# Altium PCB PCB_connector_V1.0_2024-03-05.pcbdoc
Units mm, origin at the board's own origin, x right, y up, seen from the top; angles counter-clockwise.
Board outline 180.37 x 106.29 mm, 2 copper layers (Top Layer, Bottom Layer); 61 components, 75 nets, 220 pads, 225 vias.
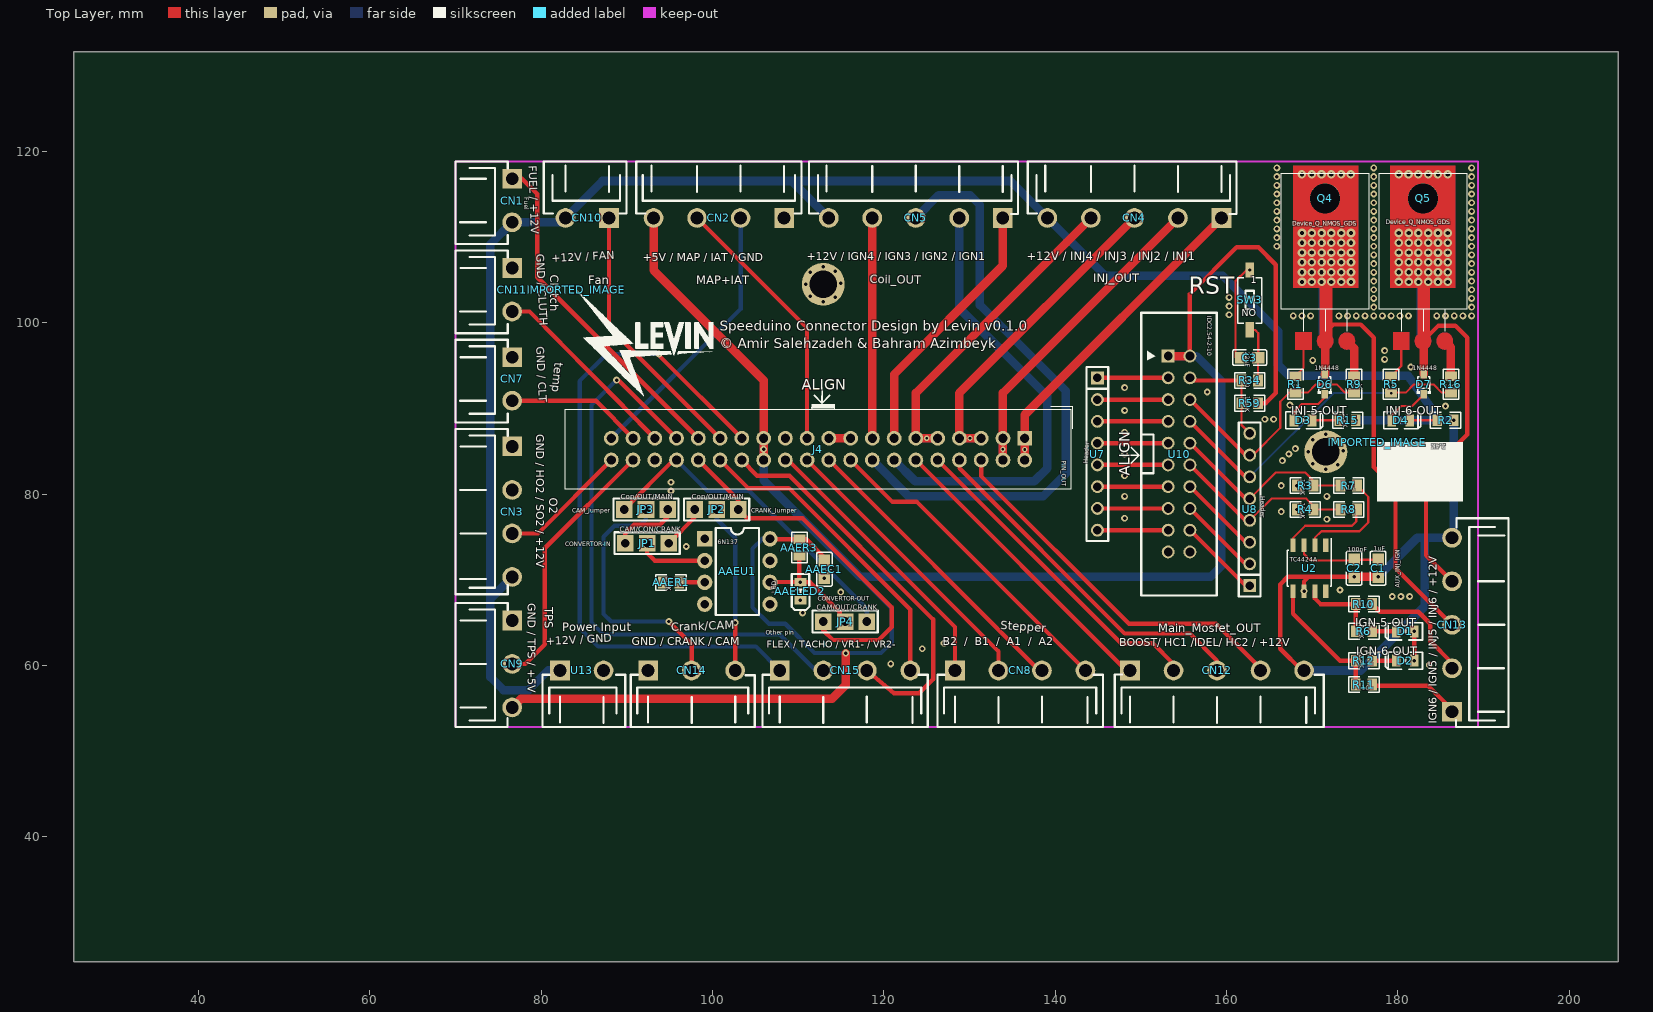
[diagram p0: Top Layer view]
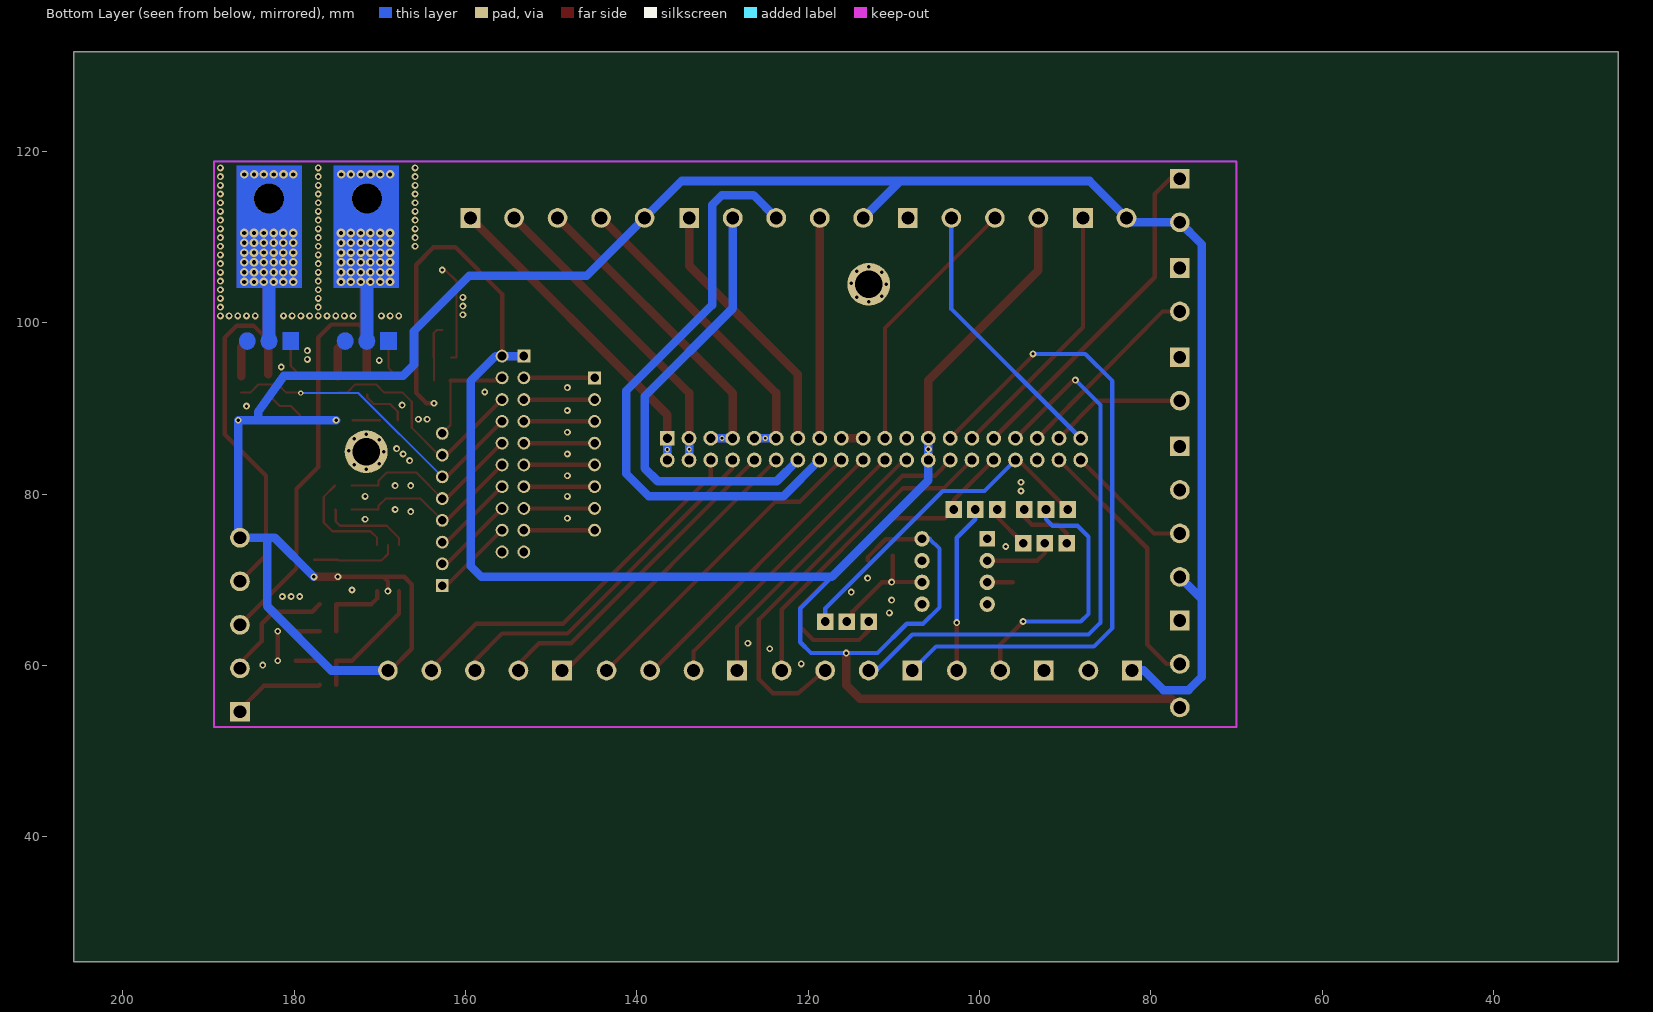
[diagram p1: Bottom Layer view, seen from below]

## Layer stack, top to bottom
Top Layer: signal copper (thickness not stored)
Dielectric: dielectric 0.32, FR-4, Dk 4.8
Bottom Layer: signal copper (thickness not stored)

## Board outline
205.772,25.4 25.4,25.4 25.4,131.687 205.772,131.687

## Components (designator, comment, footprint, x,y, rotation, side; value= is the part's Value field where it differs from the comment)
AAEC1 "1nF" C0805#1 113.062,71.235 r270 top
AAELED2 "LED" LED0805-R-RD 110.268,68.695 r90 top
AAER1 "5.6K" R0805 95.155,69.711 r180 top
AAER3 "4.7K" R0805 110.141,73.775 r90 top
AAEU1 "6N137" DIP-8_L9.7-W6.4-P2.54-LS7.6-BL 102.902,70.981 r270 top
C1 "1uF" C0805#2 177.705,71.362 r90 top
C2 "100nF" C0805#2 174.911,71.362 r90 top
C3 "22uF" C0805#2 162.719,95.954 r180 top
CN1 "Fuel" "PHONIX 2PIN (5.08MM)" 76.613,114.034 r270 top
CN2 "MAP+IAT" "PHONIX 4PIN (5.08MM)" 100.743,112.256 r180 top
CN3 "O2" "PHONIX 4PIN (5.08MM)" 76.613,77.966 r270 top
CN4 "INJ_OUT" "PHONIX 5PIN (5.08MM)" 149.257,112.256 r180 top
CN5 "Coil_OUT" "PHONIX 5PIN (5.08MM)" 123.73,112.256 r180 top
CN7 "temp" "PHONIX 2PIN (5.08MM)" 76.613,93.206 r270 top
CN8 "Stepper" "PHONIX 4PIN (5.08MM)" 135.922,59.424 r0 top
CN9 "TPS" "PHONIX 3PIN (5.08MM)" 76.613,57.646 r270 top
CN10 "Fan" "PHONIX 2PIN (5.08MM)" 85.122,112.256 r180 top
CN11 "Clutch" "PHONIX 2PIN (5.08MM)" 76.613,103.62 r270 top
CN12 "Main_Mosfet_OUT" "PHONIX 5PIN (5.08MM)" 158.909,59.424 r0 top
CN13 "AUX_INJ_IGN" "PHONIX 5PIN (5.08MM)" 186.341,64.758 r90 top
CN14 "Crank/CAM" "PHONIX 3PIN (5.08MM)" 100.108,59.424 r0 top
CN15 "Other pin" "PHONIX 4PIN (5.08MM)" 115.475,59.424 r0 top
D1 "IGN-5-OUT" LED0805_RED 180.882,63.995 r180 top
D2 "IGN-6-OUT" LED0805_RED 180.882,60.566 r180 top
D3 "INJ-5-OUT" LED0805_RED 168.944,88.633 r0 top
D4 "INJ-6-OUT" LED0805_RED 180.374,88.633 r0 top
D6 "1N4448" SOD-323_L1.8-W1.3-LS2.5-RD 171.483,92.825 r90 top
D7 "1N4448" SOD-323_L1.8-W1.3-LS2.5-RD 183.04,92.825 r90 top
IMPORTED_IMAGE "IMPORTED_IMAGE" IMPORTED_IMAGE 177.613,86.094 r0 top
IMPORTED_IMAGE "IMPORTED_IMAGE" IMPORTED_IMAGE 84.106,103.884 r0 top
J4 "PIN_OUT" IDC-HEADER_2X20_P2.54MM_VERTICAL 112.046,84.951 r270 top
JP1 "CONVERTOR-IN" "JUMPER 3X1 (PIN= 2.54)" 92.361,74.283 r180 top
JP2 "CRANK_Jumper" "JUMPER 3X1 (PIN= 2.54)" 100.489,78.22 r0 top
JP3 "CAM_Jumper" "JUMPER 3X1 (PIN= 2.54)" 92.234,78.22 r0 top
JP4 "CONVERTOR-OUT" "JUMPER 3X1 (PIN= 2.54)" 115.475,65.139 r0 top
Q4 "Device_Q_NMOS_GDS" TO-220_Q_NMOS_GDS 171.482,106.16 r0 top
Q5 "Device_Q_NMOS_GDS" TO-220_Q_NMOS_GDS 182.912,106.16 r0 top
R1 "1K" R0805 168.053,92.825 r90 top
R2 "2.4K" R0805 185.579,88.634 r180 top
R3 "100K" R0805 169.196,81.014 r0 top
R4 "100K" R0805 169.196,78.22 r180 top
R5 "1K" R0805 179.229,92.825 r90 top
R6 "2.4K" R0805 176.054,63.996 r180 top
R7 "1K" R0805 174.276,81.014 r0 top
R8 "1K" R0805 174.276,78.22 r0 top
R9 "100K" R0805 174.911,92.825 r270 top
R10 "10" R0805 176.054,67.171 r180 top
R11 "10" R0805 176.054,57.773 r180 top
R12 "2.4K" R0805 176.054,60.567 r180 top
R15 "2.4K" R0805 174.149,88.634 r180 top
R16 "100K" R0805 186.214,92.825 r90 top
R34 "120" R0805 162.719,93.287 r180 top
R59 "100K" R0805 162.719,90.62 r180 top
SW3 "RST" SW-SMD_L5.4-W2.8-LS8.2 162.719,102.685 r180 top
U2 "TC4424A" SOIC-8_3.9X4.9MM_P1.27MM 169.45,72.251 r90 top
U7 "Header" "1X8 HEADER (PIN = 2.54)" 144.939,84.697 r90 top
U8 "Header" "1X8 HEADER (PIN = 2.54)" 162.719,78.22 r270 top
U10 "IDC2.54-2-10" IDC-TH_20P-P2.54_ZX-IDC2.54-2-10PZZ 154.464,84.697 r270 top
U13 "Power Input" "PHONIX 2PIN (5.08MM)" 84.995,59.424 r0 top
? "" ? 54.017,83.554 r0 top
? "" ? 129.699,45.485 r0 top

## Footprints (in the part's own frame and the unit in brackets; to place one, negate y for a bottom-side part, rotate by r counter-clockwise, add the part's x,y. Pads: shape width x height; smd on the part's side, far side on the other; paste and mask are expansions set on the pad)
"1X8 HEADER (PIN = 2.54)" [mm]
  rect 1.5x1.5 hole 1 paste+0 mask+0.102: 1(8.89,0)
  round 1.5 hole 1 paste+0 mask+0.102: 2(6.35,0) 3(3.81,0) 4(1.27,0) 5(-1.27,0) 6(-3.81,0) 7(-6.35,0) 8(-8.89,0)
  silkscreen extent -10.16,-1.27 10.16,1.27
C0805#1 [mm]
  rect 1.41x1.35 smd paste-100 mask+0.051: 1(-1.03,0) 2(1.03,0)
  silkscreen extent -1.96,-0.9 1.96,0.9
C0805#2 [mm]
  rect 1.41x1.35 smd paste-100 mask+0.051: 1(-1,0) 2(1,0)
  silkscreen extent -1.96,-0.9 1.96,0.9
DIP-8_L9.7-W6.4-P2.54-LS7.6-BL [mm]
  rect 1.8x1.8 hole 1 paste+0 mask+0.05: 1(-3.81,-3.81)
  round 1.8 hole 1 paste+0 mask+0.05: 2(-1.27,-3.81) 3(1.27,-3.81) 4(3.81,-3.81) 5(3.81,3.81) 6(1.27,3.81) 7(-1.27,3.81) 8(-3.81,3.81)
  silkscreen extent -5.08,-2.53 5.08,2.53
IDC-HEADER_2X20_P2.54MM_VERTICAL [mil]
  rect 68x68 hole 40 slot 40.2 at 0 deg paste+0 mask+2: 1(-62.21,960.64)
  round 68 hole 40 slot 40.2 at 0 deg paste+0 mask+2: 2(37.78,960.64) 3(-62.21,860.64) 4(37.78,860.64) 5(-62.21,760.64) 6(37.78,760.64) 7(-62.21,660.64) 8(37.78,660.64) 9(-62.21,560.64) 10(37.78,560.64) 11(-62.21,460.64) 12(37.78,460.64) 13(-62.21,360.64) 14(37.78,360.64) 15(-62.21,260.64) 16(37.78,260.64) 17(-62.21,160.64) 18(37.78,160.64) 19(-62.21,60.64) 20(37.78,60.64) 21(-62.21,-39.36) 22(37.78,-39.36) 23(-62.21,-139.36) 24(37.78,-139.36) 25(-62.21,-239.36) 26(37.78,-239.36) 27(-62.21,-339.36) 28(37.78,-339.36) 29(-62.21,-439.36) 30(37.78,-439.36) 31(-62.21,-539.36) 32(37.78,-539.36) 33(-62.21,-639.36) 34(37.78,-639.36) 35(-62.21,-739.36) 36(37.78,-739.36) 37(-62.21,-839.36) 38(37.78,-839.36) 39(-62.21,-939.36) 40(37.78,-939.36)
  silkscreen extent -206,-1150 172,1181
IDC-TH_20P-P2.54_ZX-IDC2.54-2-10PZZ [mm]
  rect 1.5x1.5 hole 1.02 paste+0 mask+0.051: 1(-11.43,-1.27)
  round 1.5 hole 1.02 paste+0 mask+0.051: 2(-11.43,1.27) 3(-8.89,-1.27) 4(-8.89,1.27) 5(-6.35,-1.27) 6(-6.35,1.27) 7(-3.81,-1.27) 8(-3.81,1.27) 9(-1.27,-1.27) 10(-1.27,1.27) 11(1.27,-1.27) 12(1.27,1.27) 13(3.81,-1.27) 14(3.81,1.27) 15(6.35,-1.27) 16(6.35,1.27) 17(8.89,-1.27) 18(8.89,1.27) 19(11.43,-1.27) 20(11.43,1.27)
  silkscreen extent -16.5,-4.4 16.5,4.4
IMPORTED_IMAGE [mm]
  silkscreen extent 0,-6.9 10,0
"JUMPER 3X1 (PIN= 2.54)" [mil]
  rect 76x76 hole 39.4 paste+0 mask+4: 1(100,0) 2(0,0) 3(-100,0)
  silkscreen extent -150,-50 150,50
LED0805-R-RD [mm]
  rect 1x1.4 smd paste+0 mask+0.051: 1(1.05,0) 2(-1.05,0)
  silkscreen extent -2.22,-1.04 1.99,1.01
LED0805_RED [mm]
  rect 1x1.4 smd paste+0 mask+0.051: 1(-1.05,0) 2(1.05,0)
  silkscreen extent -2,-1 2.3,1
"PHONIX 2PIN (5.08MM)" [mm]
  rect 2.3x2.3 hole 1.5 paste+0 mask+0.051: 1(-2.794,0)
  round 2.3 hole 1.5 paste+0 mask+0.051: 2(2.286,0)
  silkscreen extent -4.83,-6.6 4.83,-0.51
"PHONIX 3PIN (5.08MM)" [mm]
  rect 2.3x2.3 hole 1.5 paste+0 mask+0.051: 1(-7.62,0)
  round 2.3 hole 1.5 paste+0 mask+0.051: 2(-2.54,0) 3(2.54,0)
  silkscreen extent -9.65,-6.6 4.83,-0.51
"PHONIX 4PIN (5.08MM)" [mm]
  rect 2.3x2.3 hole 1.5 paste+0 mask+0.051: 1(-7.62,0)
  round 2.3 hole 1.5 paste+0 mask+0.051: 2(-2.54,0) 3(2.54,0) 4(7.62,0)
  silkscreen extent -9.65,-6.6 9.65,-0.51
"PHONIX 5PIN (5.08MM)" [mm]
  rect 2.3x2.3 hole 1.5 paste+0 mask+0.051: 1(-10.16,0)
  round 2.3 hole 1.5 paste+0 mask+0.051: 2(-5.08,0) 3(0,0) 4(5.08,0) 5(10.16,0)
  silkscreen extent -11.94,-6.6 12.45,-0.46
R0805 [mm]
  rect 1.133x1.377 smd paste-100 mask+0.051: 1(-0.966,0) 2(0.966,0)
  silkscreen extent -1.76,-0.92 1.76,0.92
SOD-323_L1.8-W1.3-LS2.5-RD [mm]
  rect 1x0.75 smd paste+0 mask+0.051: 1(-1.173,0) 2(1.173,0)
  silkscreen extent -1.08,-0.8 0.9,0.8
SOIC-8_3.9X4.9MM_P1.27MM [mm]
  rect 1.55x0.6 smd paste+0 mask+0.051: 1(1.81,-2.145) 2(1.81,-0.875) 3(1.81,0.395) 4(1.81,1.665) 5(-3.59,1.665) 6(-3.59,0.395) 7(-3.59,-0.875) 8(-3.59,-2.145)
  silkscreen extent -2.97,-2.81 2.58,2.34
SW-SMD_L5.4-W2.8-LS8.2 [mm]
  rect 1x1.8 smd paste+0 mask+0.05: 1(0,-3.493) 2(0,3.492)
  silkscreen extent -1.4,-2.6 1.4,2.73
TO-220_Q_NMOS_GDS [mm]
  round 3.5 hole 3.5 unplated paste+0: ""(0.043,8.385)
  Top Layer region: 3.536,-8.323 3.528,-8.442 3.506,-8.559 3.469,-8.673 3.418,-8.781 3.354,-8.882 3.277,-8.975 3.19,-9.056 3.093,-9.127 2.989,-9.184 2.877,-9.228 2.761,-9.258 2.643,-9.273 2.523,-9.273 2.405,-9.258 2.289,-9.228 2.178,-9.184 2.073,-9.127 1.976,-9.056 1.889,-8.975 1.813,-8.882 1.748,-8.781 1.697,-8.673 1.66,-8.559 1.638,-8.442 1.631,-8.323 1.631,-8.228 1.638,-8.108 1.66,-7.991 1.697,-7.877 1.748,-7.769 1.813,-7.668 1.889,-7.576 1.976,-7.494 2.073,-7.423 2.178,-7.366 2.289,-7.322 2.405,-7.292 2.523,-7.277 2.643,-7.277 2.761,-7.292 2.877,-7.322 2.989,-7.366 3.093,-7.423 3.19,-7.494 3.277,-7.576 3.354,-7.668 3.418,-7.769 3.469,-7.877 3.506,-7.991 3.528,-8.108 3.536,-8.228
  Top Layer region: 0.996,-8.323 0.988,-8.442 0.966,-8.559 0.929,-8.673 0.878,-8.781 0.814,-8.882 0.737,-8.975 0.65,-9.056 0.553,-9.127 0.449,-9.184 0.337,-9.228 0.221,-9.258 0.103,-9.273 -0.017,-9.273 -0.135,-9.258 -0.251,-9.228 -0.362,-9.184 -0.467,-9.127 -0.564,-9.056 -0.651,-8.975 -0.727,-8.882 -0.791,-8.781 -0.843,-8.673 -0.88,-8.559 -0.902,-8.442 -0.909,-8.323 -0.909,-8.228 -0.902,-8.108 -0.88,-7.991 -0.843,-7.877 -0.791,-7.769 -0.727,-7.668 -0.651,-7.576 -0.564,-7.494 -0.467,-7.423 -0.362,-7.366 -0.251,-7.322 -0.135,-7.292 -0.017,-7.277 0.103,-7.277 0.221,-7.292 0.337,-7.322 0.449,-7.366 0.553,-7.423 0.65,-7.494 0.737,-7.576 0.814,-7.668 0.878,-7.769 0.929,-7.877 0.966,-7.991 0.988,-8.108 0.996,-8.228
  Top Layer region: -3.449,-7.275 -1.544,-7.275 -1.544,-9.275 -3.449,-9.275
  Bottom Layer region: 3.536,-8.323 3.528,-8.442 3.506,-8.559 3.469,-8.673 3.418,-8.781 3.354,-8.882 3.277,-8.975 3.19,-9.056 3.093,-9.127 2.989,-9.184 2.877,-9.228 2.761,-9.258 2.643,-9.273 2.523,-9.273 2.405,-9.258 2.289,-9.228 2.178,-9.184 2.073,-9.127 1.976,-9.056 1.889,-8.975 1.813,-8.882 1.748,-8.781 1.697,-8.673 1.66,-8.559 1.638,-8.442 1.631,-8.323 1.631,-8.228 1.638,-8.108 1.66,-7.991 1.697,-7.877 1.748,-7.769 1.813,-7.668 1.889,-7.576 1.976,-7.494 2.073,-7.423 2.178,-7.366 2.289,-7.322 2.405,-7.292 2.523,-7.277 2.643,-7.277 2.761,-7.292 2.877,-7.322 2.989,-7.366 3.093,-7.423 3.19,-7.494 3.277,-7.576 3.354,-7.668 3.418,-7.769 3.469,-7.877 3.506,-7.991 3.528,-8.108 3.536,-8.228
  Bottom Layer region: 0.996,-8.323 0.988,-8.442 0.966,-8.559 0.929,-8.673 0.878,-8.781 0.814,-8.882 0.737,-8.975 0.65,-9.056 0.553,-9.127 0.449,-9.184 0.337,-9.228 0.221,-9.258 0.103,-9.273 -0.017,-9.273 -0.135,-9.258 -0.251,-9.228 -0.362,-9.184 -0.467,-9.127 -0.564,-9.056 -0.651,-8.975 -0.727,-8.882 -0.791,-8.781 -0.843,-8.673 -0.88,-8.559 -0.902,-8.442 -0.909,-8.323 -0.909,-8.228 -0.902,-8.108 -0.88,-7.991 -0.843,-7.877 -0.791,-7.769 -0.727,-7.668 -0.651,-7.576 -0.564,-7.494 -0.467,-7.423 -0.362,-7.366 -0.251,-7.322 -0.135,-7.292 -0.017,-7.277 0.103,-7.277 0.221,-7.292 0.337,-7.322 0.449,-7.366 0.553,-7.423 0.65,-7.494 0.737,-7.576 0.814,-7.668 0.878,-7.769 0.929,-7.877 0.966,-7.991 0.988,-8.108 0.996,-8.228
  Bottom Layer region: -3.449,-7.275 -1.544,-7.275 -1.544,-9.275 -3.449,-9.275
  Multi-Layer region: 3.536,-8.323 3.528,-8.442 3.506,-8.559 3.469,-8.673 3.418,-8.781 3.354,-8.882 3.277,-8.975 3.19,-9.056 3.093,-9.127 2.989,-9.184 2.877,-9.228 2.761,-9.258 2.643,-9.273 2.523,-9.273 2.405,-9.258 2.289,-9.228 2.178,-9.184 2.073,-9.127 1.976,-9.056 1.889,-8.975 1.813,-8.882 1.748,-8.781 1.697,-8.673 1.66,-8.559 1.638,-8.442 1.631,-8.323 1.631,-8.228 1.638,-8.108 1.66,-7.991 1.697,-7.877 1.748,-7.769 1.813,-7.668 1.889,-7.576 1.976,-7.494 2.073,-7.423 2.178,-7.366 2.289,-7.322 2.405,-7.292 2.523,-7.277 2.643,-7.277 2.761,-7.292 2.877,-7.322 2.989,-7.366 3.093,-7.423 3.19,-7.494 3.277,-7.576 3.354,-7.668 3.418,-7.769 3.469,-7.877 3.506,-7.991 3.528,-8.108 3.536,-8.228
  Multi-Layer region: 0.996,-8.323 0.988,-8.442 0.966,-8.559 0.929,-8.673 0.878,-8.781 0.814,-8.882 0.737,-8.975 0.65,-9.056 0.553,-9.127 0.449,-9.184 0.337,-9.228 0.221,-9.258 0.103,-9.273 -0.017,-9.273 -0.135,-9.258 -0.251,-9.228 -0.362,-9.184 -0.467,-9.127 -0.564,-9.056 -0.651,-8.975 -0.727,-8.882 -0.791,-8.781 -0.843,-8.673 -0.88,-8.559 -0.902,-8.442 -0.909,-8.323 -0.909,-8.228 -0.902,-8.108 -0.88,-7.991 -0.843,-7.877 -0.791,-7.769 -0.727,-7.668 -0.651,-7.576 -0.564,-7.494 -0.467,-7.423 -0.362,-7.366 -0.251,-7.322 -0.135,-7.292 -0.017,-7.277 0.103,-7.277 0.221,-7.292 0.337,-7.322 0.449,-7.366 0.553,-7.423 0.65,-7.494 0.737,-7.576 0.814,-7.668 0.878,-7.769 0.929,-7.877 0.966,-7.991 0.988,-8.108 0.996,-8.228
  Multi-Layer region: -3.449,-7.275 -1.544,-7.275 -1.544,-9.275 -3.449,-9.275
  silkscreen extent -5.08,-7.12 5.16,11.31
? [mm]

## Free pads (board coordinates)
  round 5 hole 3.2 paste+0 mask+0.051: 1(112.935,104.509) 1(171.609,84.951)

## Via types
v1: diameter 0.8, hole 0.4, Top Layer to Bottom Layer, tented both sides, 136 vias
v2: diameter 1, hole 0.5, Top Layer to Bottom Layer, tented both sides, 84 vias
v3: diameter 0.62, hole 0.31, Top Layer to Bottom Layer, tented both sides, 5 vias

## Nets (pads, with @x,y where several pads share a name; then routed paths per layer and width w, separated by ;. In a path a pad name is that pad's centre, name@x,y a point inside that pad or via, vN(x,y) a via of type N, cw(c..) or ccw(c..) an arc to the next point about the centre after c; other vN are vias at no path point)
12V-SW: C1.1 C2.1 CN1.2 CN3.4 CN4.5 CN5.5 CN10.2 CN12.5 CN13.5 R2.1 R15.1 U2.6 U13.1 | length 285.3
  Top Layer w0.5: U2.6@169.054,68.66 169.054,69.823 169.592,70.361 ; CN12.5 168.815,59.424 166.275,61.964 166.275,69.472 167.164,70.361 169.592,70.361 ; C2.1@174.911,70.361 169.592,70.361
  Top Layer w1: v1(174.911,70.362) C1.1
  Bottom Layer w1: 74.073,67.433 74.073,109.208 CN1.2 82.328,111.748 CN10.2 87.154,116.574 109.252,116.574 CN5.5 ; CN3.4 74.073,67.806 74.073,58.662 75.597,57.138 78.518,57.138 80.804,59.424 U13.1 ; 108.363,116.574 111.792,116.574 134.779,116.574 CN4.5 145.828,105.525 159.544,105.525 166.021,99.048 166.021,95.111 167.291,93.841 181.21,93.841 184.22,89.617 184.237,88.634 ; CN12.5 175.673,59.424 183.166,66.917 183.166,74.918 ; v1(175.115,88.634) v1(186.545,88.634) 186.545,75.122 CN13.5 182.277,74.918 v1(177.705,70.346)
  other v1: 169.069,68.695
+VDDA: AAEC1.1 AAER3.2 AAEU1.8 CN2.4 CN9.3 J4.25 J4.26 R59.1 U10.1 U10.2 | length 273.8
  Top Layer w0.5: AAEU1.8 106.762,74.741 AAER3.2 110.954,74.74 113.062,72.632 AAEC1.1@113.062,72.264 ; U10.2 155.734,103.366 161.195,108.827 163.735,108.827 165.767,106.795 165.767,91.809 164.578,90.62 v1(163.685,90.62)
  Top Layer w1: CN9.3 77.629,56.122 113.951,56.122 115.562,57.732 v1(115.562,61.456) ; CN2.4 93.123,106.16 105.965,93.318 J4.25 ; J4.26 v1(105.967,85.245) J4.25 ; U10.1 U10.2
  Bottom Layer w0.5: J4.26@105.965,83.991 105.965,81.634 120.936,66.663 120.936,62.726 119.666,61.456 v1(115.562,61.456) 111.919,61.456 108.49,64.885 106.585,64.885 104.68,66.79 104.68,73.648 105.823,74.791 AAEU1.8
  Bottom Layer w1: J4.26@105.965,83.991 105.965,81.634 117.253,70.346 158.147,70.346 159.417,71.616 159.417,93.206 156.496,96.127 U10.2 U10.1 ; J4.26 J4.25
AAELED2_1: AAELED2.1 AAER3.1 AAEU1.6 JP4.2 | length 14.5
  Top Layer w0.5: AAEU1.6 106.747,69.745 v1(110.268,69.745) 110.141,69.872 AAER3.1 ; v1(110.268,69.745) 110.301,69.711 111.411,69.711 114.84,66.282 114.84,65.139 JP4.2
AAER1_1: AAER1.1 AAEU1.3 | length 3
  Top Layer w0.5: AAER1.1 AAEU1.3
AAEU1_2: AAEU1.2 JP1.2 | length 8.2
  Top Layer w0.5: JP1.2 92.361,73.14 93.25,72.251 AAEU1.2
BOOST: 
BOOST-OUT: CN12.1 J4.12 | length 35.2
  Top Layer w0.5: J4.12 148.314,59.424 CN12.1
CAM-IN: JP1.1 JP3.1 | length 7.8
  Top Layer w0.5: JP1.1 89.821,75.426 90.837,76.442 93.885,76.442 94.774,77.331 JP3.1
CAM-IN-SIG: CN14.3 JP2.2 | length 19.7
  Top Layer w0.5: CN14.3 v1(102.648,65.012)
  Bottom Layer w0.5: JP2.2 100.489,77.077 102.648,74.918 v1(102.648,65.012)
CAM-IN-SIG-OUT: J4.32 JP2.1 JP4.3 | length 42.8
  Top Layer w0.5: J4.32 103.029,79.309 JP2.1 104.045,77.204 110.522,77.204 120.936,66.79 120.936,64.504 119.412,62.98 114.078,62.98 112.935,64.123 JP4.3
CLT_SENSOR: CN7.2 J4.37 | length 15.9
  Top Layer w0.5: CN7.2 86.392,90.92 J4.37
CLUTCH_IN: CN11.2 J4.35 | length 22.8
  Top Layer w0.5: CN11.2 78.645,101.334 J4.35
CRANK-IN: JP1.3 JP2.3 | length 5.2
  Top Layer w0.5: JP1.3 97.949,77.331 JP2.3
CRANK-IN-SIG: CN14.2 JP3.2 | length 30.8
  Top Layer w0.5: v1(94.901,65.139) 97.568,62.472 CN14.2
  Bottom Layer w0.5: JP3.2 92.234,77.077 91.472,76.315 88.551,76.315 87.281,75.045 87.281,66.028 88.17,65.139 v1(94.901,65.139)
CRANK-IN-SIG_OUT: J4.34 JP3.3 JP4.1 | length 39.4
  Top Layer w0.5: JP3.3 95.466,83.991 J4.34
  Bottom Layer w0.5: J4.34 99.419,80.379 104.299,80.379 118.015,66.663 JP4.1
D1_2: D1.2 R6.1 | length 2.8
  Top Layer w0.5: R6.1 D1.2@179.83,63.996
D2_2: D2.2 R12.1 | length 2.8
  Top Layer w0.5: R12.1 D2.2@179.83,60.567
D3_1: D3.1 D6.1 | length 5.6
  Top Layer w0.254: D3.1@167.892,88.634 167.926,88.668 167.926,89.65 168.815,90.539 170.72,90.539 171.482,91.301 D6.1
D3_2: D3.2 R15.2 | length 3.2
  Top Layer w0.254: D3.2@169.993,88.634 R15.2
D4_1: D4.1 D7.1 | length 5.3
  Top Layer w0.254: D4.1@179.322,88.634 179.322,89.235 180.372,90.285 181.672,90.285 D7.1
D4_2: D4.2 R2.2 | length 3.2
  Top Layer w0.254: D4.2@181.423,88.634 R2.2
FAN-OUT: CN10.1 J4.29 | length 31.1
  Top Layer w0.5: CN10.1 87.916,99.501 J4.29
FUELPUMP-OUT: CN1.1 J4.31 | length 40
  Top Layer w0.5: CN1.1 77.756,116.828 79.534,115.05 79.534,105.343 J4.31
GND: AAEC1.2 AAELED2.2 AAER1.2 AAEU1.5 C1.2 C2.2 C3.2 CN2.1 CN3.1 CN7.1 CN9.1 CN11.1 CN14.1 D1.1 D2.1 J4.17 J4.19 J4.23 J4.36 R3.1 R4.2 R9.1 R16.2 SW3.1 U2.3 U10.19 U10.20 U13.2 | length 36.7
  Top Layer w0.254: C3.2 161.068,95.954 161.068,104.89 162.356,106.178 v1(162.719,106.178) ; U2.3@169.054,74.06 169.054,73.028 169.831,72.251 174.911,72.251 C2.2 ; C2.2 C1.2
  Top Layer w0.5: v1(181.931,60.567) v1(181.931,63.996)
  Top Layer w1: J4.19 J4.17 ; 174.065,97.885 174.911,97.039 R9.1 ; 185.495,97.885 186.214,97.166 R16.2
  other v1: 183.674,60.059 120.809,60.186 124.492,61.964 127.032,62.599 110.522,66.155 110.268,67.645 179.356,68.06 180.372,68.06 181.388,68.06 114.967,68.568 173.26,68.822 113.062,70.205 96.933,73.902 171.736,77.077 148.114,77.204 166.402,77.966 168.23,78.22 148.114,79.744 171.736,79.744 95.155,80.379 166.402,81.014 168.23,81.014 95.155,81.395 148.114,82.157 166.529,83.935 148.114,84.697 167.291,84.697 168.053,85.332 148.114,87.237 164.497,88.761 165.513,88.761 148.114,89.777 185.579,90.285 167.418,90.412 157.766,91.936 148.114,92.444 181.515,94.857 170.085,95.619 178.467,95.746 178.467,96.762 167.799,100.826 168.815,100.826 169.831,100.826 173.133,100.826 174.149,100.826 175.165,100.826 176.181,100.826 177.197,100.826 178.213,100.826 179.229,100.826 180.245,100.826 181.261,100.826 184.563,100.826 185.579,100.826 186.595,100.826 187.611,100.826 188.627,100.826 160.306,100.953 177.197,101.842 188.627,101.842 160.306,101.969 177.197,102.858 188.627,102.858 160.306,102.985 177.197,103.874 188.627,103.874 177.197,104.89 188.627,104.89 177.197,105.906 188.627,105.906 177.197,106.922 188.627,106.922 177.197,107.938 188.627,107.938 165.894,108.954 177.197,108.954 188.627,108.954 165.894,109.97 177.197,109.97 188.627,109.97 165.894,110.986 177.197,110.986 188.627,110.986 165.894,112.002 177.197,112.002 188.627,112.002 165.894,113.018 177.197,113.018 188.627,113.018 165.894,114.034 177.197,114.034 188.627,114.034 165.894,115.05 177.197,115.05 188.627,115.05 165.894,116.066 177.197,116.066 188.627,116.066 165.894,117.082 177.197,117.082 188.627,117.082 165.894,118.098 177.197,118.098 188.627,118.098
HC-1-OUT: CN12.2 J4.10 | length 38.2
  Top Layer w0.5: J4.10 147.679,62.599 151.416,62.599 153.829,60.186 CN12.2
HC-2-OUT: CN12.4 J4.6 | length 44
  Top Layer w0.5: J4.6@131.365,83.991 131.365,82.142 148.622,64.885 158.782,64.885 163.989,59.678 CN12.4
IAT_SENSOR: CN2.2 J4.39 | length 32
  Bottom Layer w0.5: J4.39 103.283,101.628 CN2.2
IDLE-OUT: CN12.3 J4.8 | length 41.5
  Top Layer w0.5: J4.8@128.825,83.991 128.825,83.031 148.114,63.742 155.734,63.742 158.909,60.567 CN12.3
IGN-1-OUT: CN5.1 J4.13 | length 31
  Top Layer w1: J4.13 121.207,93.984 133.89,106.668 CN5.1
IGN-2-OUT: CN5.2 J4.14 | length 53
  Bottom Layer w1: J4.14@121.205,83.991 123.677,81.522 137.573,81.522 139.097,83.046 139.097,91.428 128.81,101.715 CN5.2
IGN-3-OUT: CN5.3 J4.16 | length 70
  Bottom Layer w1: J4.16@118.665,83.991 122.915,79.744 138.589,79.744 141.256,82.411 141.256,92.063 131.223,102.096 131.223,113.78 130.08,114.923 126.397,114.923 CN5.3
IGN-4-OUT: CN5.4 J4.15 | length 25.7
  Top Layer w1: CN5.4 J4.15
IGN-5-IN: R3.2 R7.1 U8.5 U10.10 | length 22.5
  Top Layer w0.254: U8.5 165.767,82.538 169.196,82.538 170.162,81.572 R3.2 R7.1
  Top Layer w0.5: U10.10 162.211,79.49 U8.5
IGN-5-OUT: CN13.2 R10.1 | length 14
  Top Layer w0.5: R10.1 177.909,66.282 182.404,66.282 183.801,64.885 183.801,62.853 186.341,60.313 CN13.2
IGN-6-IN: R4.1 R8.1 U8.4 U10.12 | length 22.1
  Top Layer w0.254: U8.4 165.259,79.49 169.323,79.49 170.162,78.651 R4.1 R8.1
  Top Layer w0.5: U10.12 162.211,76.95 U8.4
IGN-6-OUT: CN13.1 R11.1 | length 10.8
  Top Layer w0.5: R11.1 177.147,57.646 183.547,57.646 186.341,54.852 CN13.1
INJ-1-OUT: CN4.1 J4.1 J4.2 | length 40.3
  Top Layer w1: J4.1 136.445,89.284 CN4.1 ; J4.2 J4.1
  Bottom Layer w1: J4.2 v3(136.447,85.22) J4.1
INJ-2-OUT: CN4.2 J4.3 J4.4 | length 39.3
  Top Layer w1: J4.3 133.905,91.824 CN4.2 ; J4.4 J4.3
  Bottom Layer w1: J4.4 v3(133.907,85.271) J4.3
INJ-3-OUT: CN4.3 J4.5 J4.7 | length 39.3
  Top Layer w1: J4.7@128.81,86.531 128.81,91.809 CN4.3 ; J4.7 J4.5
  Bottom Layer w1: J4.7 v3(130.064,86.531) J4.5
INJ-4-OUT: CN4.4 J4.9 J4.11 | length 39.3
  Top Layer w1: J4.11 123.745,91.824 CN4.4 ; J4.11 J4.9
  Bottom Layer w1: J4.11 v3(125.01,86.531) J4.9
INJ-5-IN: R1.1 R9.2 U8.7 U10.6 | length 27.5
  Top Layer w0.254: U8.7 163.1,84.57 166.275,87.745 166.275,90.793 167.342,91.86 R1.1 169.501,91.86 170.466,92.825 172.879,92.825 173.844,91.86 R9.2
  Top Layer w0.5: U10.6 162.211,84.57 U8.7
INJ-5-OUT: CN13.3 D6.2 | length 64.8
  Top Layer w0.5: 171.525,97.885 171.525,98.837 172.498,99.81 175.673,99.81 177.197,98.286 177.197,83.173 179.737,80.633 179.737,71.362 CN13.3
  Top Layer w1: D6.2 171.525,94.041 171.525,97.885
  Top Layer w1.5: 171.525,97.885 171.609,97.969 171.609,105.144
  Bottom Layer w1.5: 171.525,97.885 171.525,106.287 ; v2@171.525,105.652 171.736,105.652
  other v2: 168.826,104.785 169.969,104.785 171.112,104.785 172.255,104.785 173.398,104.785 174.541,104.785 168.826,105.928 169.969,105.928 171.112,105.928 172.255,105.928 173.398,105.928 174.541,105.928 168.826,107.071 169.969,107.071 171.112,107.071 172.255,107.071 173.398,107.071 174.541,107.071 168.826,108.214 169.969,108.214 171.112,108.214 172.255,108.214 173.398,108.214 174.541,108.214 168.826,109.357 169.969,109.357 171.112,109.357 172.255,109.357 173.398,109.357 174.541,109.357 168.826,110.5 169.969,110.5 171.112,110.5 172.255,110.5 173.398,110.5 174.541,110.5 168.815,117.336 169.958,117.336 171.101,117.336 172.244,117.336 173.387,117.336 174.53,117.336
INJ-6-IN: R5.1 R16.1 U8.6 U10.8 | length 38
  Top Layer w0.254: R5.1 180.931,91.86 181.896,92.825 184.182,92.825 185.147,91.86 R16.1
  Top Layer w0.5: U10.8 162.211,82.03 U8.6
  Bottom Layer w0.254: U8.6 172.498,91.809 v3(179.229,91.809)
INJ-6-OUT: CN13.4 D7.2 | length 59
  Top Layer w0.5: 182.955,97.885 184.754,99.683 186.722,99.683 188.119,98.286 188.119,86.983 183.293,82.157 183.293,72.886 CN13.4
  Top Layer w1: 182.955,97.885 183.039,97.801 D7.2
  Top Layer w1.5: 182.955,97.885 183.039,97.969 183.039,105.271
  Bottom Layer w1.5: 182.828,106.541 183.039,106.541 ; 182.955,97.885 182.955,107.176
  other v2: 180.129,104.785 181.272,104.785 182.415,104.785 183.558,104.785 184.701,104.785 185.844,104.785 180.129,105.928 181.272,105.928 182.415,105.928 183.558,105.928 184.701,105.928 185.844,105.928 180.129,107.071 181.272,107.071 182.415,107.071 183.558,107.071 184.701,107.071 185.844,107.071 180.129,108.214 181.272,108.214 182.415,108.214 183.558,108.214 184.701,108.214 185.844,108.214 180.129,109.357 181.272,109.357 182.415,109.357 183.558,109.357 184.701,109.357 185.844,109.357 180.129,110.5 181.272,110.5 182.415,110.5 183.558,110.5 184.701,110.5 185.844,110.5 180.118,117.336 181.261,117.336 182.404,117.336 183.547,117.336 184.69,117.336 185.833,117.336
MAP-EXT: CN2.3 J4.21 | length 31
  Top Layer w0.5: CN2.3 111.045,99.414 J4.21
MCU-D2/FLEXSENSOR: CN15.1 J4.27 | length 78.7
  Top Layer w0.5: v1(93.758,96.381) 93.758,96.199 J4.27
  Bottom Layer w0.5: v1(93.758,96.381) 87.662,96.381 84.487,93.206 84.487,64.377 86.646,62.218 105.061,62.218 CN15.1
O2_SENSOR: CN3.3 J4.40 | length 15.1
  Top Layer w0.5: CN3.3 79.621,75.426 J4.40
Q4_1: R1.2 | length 4.5
  Top Layer w0.254: R1.2 168.985,94.723 168.985,97.885
Q5_1: R5.2 | length 4.6
  Top Layer w0.254: R5.2 180.415,94.977 180.415,97.885
RESET: R34.2 R59.2 U8.8 U10.4 | length 12.7
  Top Layer w0.254: R34.2 R59.2 161.753,88.076 U8.8
  Top Layer w0.5: U10.4 156.035,93.287 R34.2
S$7939: 
STEP-A1: CN8.3 J4.20 | length 35.1
  Top Layer w0.5: J4.20@113.585,83.991 138.155,59.424 CN8.3
STEP-A2: CN8.4 J4.18 | length 37.6
  Top Layer w0.5: J4.18@116.125,83.991 121.007,79.109 123.857,79.109 CN8.4
STEP-B1: CN8.2 J4.22 | length 33.8
  Top Layer w0.5: J4.22 133.382,61.656 CN8.2
STEP-B2: CN8.1 J4.24 | length 32.9
  Top Layer w0.5: J4.24@108.505,83.991 108.815,83.991 128.302,64.504 CN8.1
SW3_2: C3.1 R34.1 SW3.2 | length 6.7
  Top Layer w0.254: SW3.2 163.336,99.193 163.72,98.809 C3.1@163.72,95.954 ; R34.1 163.686,95.92 C3.1
TACHO-OUT: CN15.2 J4.33 | length 68.7
  Top Layer w0.5: v1(88.805,93.333) 89.005,93.333 J4.33
  Bottom Layer w0.5: v1(88.805,93.333) 85.884,90.412 85.884,65.012 87.281,63.615 107.855,63.615 112.046,59.424 CN15.2
TPS_SENSOR: CN9.2 J4.38 | length 30.5
  Top Layer w0.5: CN9.2 78.137,60.186 80.423,62.472 80.423,73.688 J4.38
U2_2: R7.2 U2.2 | length 12.7
  Top Layer w0.254: U2.2 170.325,74.904 171.101,75.68 175.546,75.68 176.562,76.696 176.562,79.694 R7.2
U2_4: R8.2 U2.4 | length 10.4
  Top Layer w0.254: U2.4 167.785,74.904 169.196,76.315 174.657,76.315 175.165,76.823 175.165,78.143 R8.2
U2_5: R11.2 R12.2 U2.5 | length 15
  Top Layer w0.5: U2.5 167.785,66.042 173.26,60.567 R12.2 R11.2
U2_7: R6.2 R10.2 U2.7 | length 9
  Top Layer w0.5: U2.7@170.324,68.66 170.324,67.821 170.974,67.171 175.089,67.171 R6.2
U10_3: U7.1 U10.3 | length 8.3
  Top Layer w0.5: U7.1 U10.3
U10_5: U7.2 U10.5 | length 8.3
  Top Layer w0.5: U7.2 U10.5
U10_7: U7.3 U10.7 | length 8.3
  Top Layer w0.5: U7.3 U10.7
U10_9: U7.4 U10.9 | length 8.3
  Top Layer w0.5: U7.4 U10.9
U10_11: U7.5 U10.11 | length 8.3
  Top Layer w0.5: U7.5 U10.11
U10_13: U7.6 U10.13 | length 8.3
  Top Layer w0.5: U7.6 U10.13
U10_14: U8.3 U10.14 | length 9.7
  Top Layer w0.5: U10.14 162.211,74.41 U8.3
U10_15: U7.7 U10.15 | length 8.3
  Top Layer w0.5: U7.7 U10.15
U10_16: U8.2 U10.16 | length 9.7
  Top Layer w0.5: U10.16 162.211,71.87 U8.2
U10_17: U7.8 U10.17 | length 8.3
  Top Layer w0.5: U7.8 U10.17
U10_18: U8.1 U10.18 | length 9.7
  Top Layer w0.5: U10.18 162.211,69.33 U8.1
VR1-: CN15.3 J4.28 | length 46.4
  Top Layer w0.5: J4.28@103.425,83.991 105.188,82.157 108.998,82.157 125.762,65.393 125.762,58.408 124.111,56.757 121.19,56.757 CN15.3
VR2-: CN15.4 J4.30 | length 36.6
  Top Layer w0.5: J4.30@100.885,83.991 104.162,80.714 108.917,80.714 123.095,66.536 CN15.4
pads on no net: AAEU1.1 AAEU1.4 AAEU1.7 CN3.2 Q4. Q5. U2.1 U2.8
copper on no net:
  other v1: 171.609,82.919 173.006,83.427 170.085,83.554 169.577,84.951 173.641,85.078 170.085,86.348 173.006,86.475 171.609,86.983 112.935,102.477 114.332,102.985 111.411,103.112 110.903,104.509 114.967,104.636 111.411,105.906 114.332,106.033 112.935,106.541

## Polygon pours and split planes (outlines as drawn)
GND on Bottom Layer (solid): 70.009,118.86 189.389,118.86 189.389,52.82 70.009,52.82
GND on Top Layer (solid): 70.009,118.86 189.389,118.86 189.389,52.82 70.009,52.82

## Other copper
Top Layer:
  region net INJ-6-OUT: 186.722,118.352 186.722,104.128 179.102,104.128 179.102,118.352
  region net INJ-5-OUT: 175.419,118.352 175.419,104.128 167.799,104.128 167.799,118.352
Bottom Layer:
  region net INJ-6-OUT: 186.722,118.352 186.722,104.128 179.102,104.128 179.102,118.352
  region net INJ-5-OUT: 175.419,118.352 175.419,104.128 167.799,104.128 167.799,118.352

## Silkscreen, mask and mechanical layers (free items; w line width, h text height)
Top Overlay:
  lines w0.12: 111.588,89.941 111.588,90.441 114.288,90.441 114.288,89.941 ; 111.588,90.241 114.288,90.241 114.288,90.141 111.588,90.141 111.588,90.041 114.288,90.041 ; 111.588,90.291 114.288,90.291 ; 111.588,90.341 114.288,90.341 ; 111.588,90.391 114.288,90.391
  lines w0.2: 111.889,91.54 112.788,90.641 112.808,92.444 ; 112.788,90.641 113.688,91.541 ; 147.987,84.57 149.791,84.55 ; 148.891,83.651 149.791,84.55 ; 148.89,85.45 149.79,84.55
  text "FUEL / +12V" at 78.552,118.336 h0.95 r272
  text "GND / CLUTH" at 79.441,108.04 h0.95 r273
  text "+12V / IGN4 / IGN3 / IGN2 / IGN1" at 111.03,107.336 h0.95
  text "+12V / INJ4 / INJ3 / INJ2 / INJ1" at 136.684,107.311 h1
  text "+5V / MAP / IAT / GND" at 91.853,107.209 h0.95
  text "+12V / FAN" at 81.21,107.083 h0.95 r3
  text "Speeduino Connector Design by Levin v0.1.0" at 100.87,98.667 h2
  text "GND / CLT" at 79.441,97.245 h0.95 r273
  text "© Amir Salehzadeh & Bahram Azimbeyk" at 100.87,96.635 h2
  text "ALIGN" at 110.395,92.2 h1.25
  text "GND / HO2 / SO2 / +12V" at 79.44,86.983 h0.95 r270
  text "ALIGN" at 148.739,82.157 h1.25 r90
  text "Con/OUT/MAIN" at 89.313,79.444 h0.6
  text "Con/OUT/MAIN" at 97.568,79.444 h0.6
  text "CAM/CON/CRANK" at 89.186,75.634 h0.6
  text "GND / TPS / +5V" at 78.424,67.298 h0.95 r270
  text "CAM/OUT/CRANK" at 112.173,66.49 h0.6
  text "+12V / GND" at 80.575,62.379 h0.95 r3
  text "GND / CRANK / CAM" at 90.583,62.378 h0.95
  text "B2  /  B1  /  A1  /  A2" at 126.905,62.378 h0.95
  text "BOOST/ HC1 /IDEL/ HC2 / +12V" at 147.479,62.251 h0.95
  text "FLEX / TACHO / VR1- / VR2-" at 106.331,62.072 h0.8
  text "IGN6 / IGN5 / INJ5 / INJ6 / +12V" at 184.53,53.201 h0.95 r90
Top Solder:
  region net BOOST: 179.102,104.128 179.102,115.304 186.722,115.304 186.722,104.128
  region net BOOST: 167.799,104.128 167.799,115.304 175.419,115.304 175.419,104.128

## Text inside footprints (layer, text, board x,y; h text height)
Q4: Document "Q3" at 170.725,117.965 h1
Q5: Document "Q3" at 182.155,117.965 h1
SW3: Top Overlay "ON" at 163.481,101.624 h0.8 r180; Top Overlay "1" at 162.846,104.634 h0.8
U2: Document "U4" at 170.458,70.6 h1 r90